# Altium PCB 5V Regulator.PcbDoc
Units mil, origin at the board's own origin, x right, y up, seen from the top; angles counter-clockwise.
Board outline 6000 x 4000 mil, 2 copper layers (Top Layer, Bottom Layer); 12 components, 8 nets, 31 pads, 6 vias.
Unrouted connection lines stored in the file: 21.
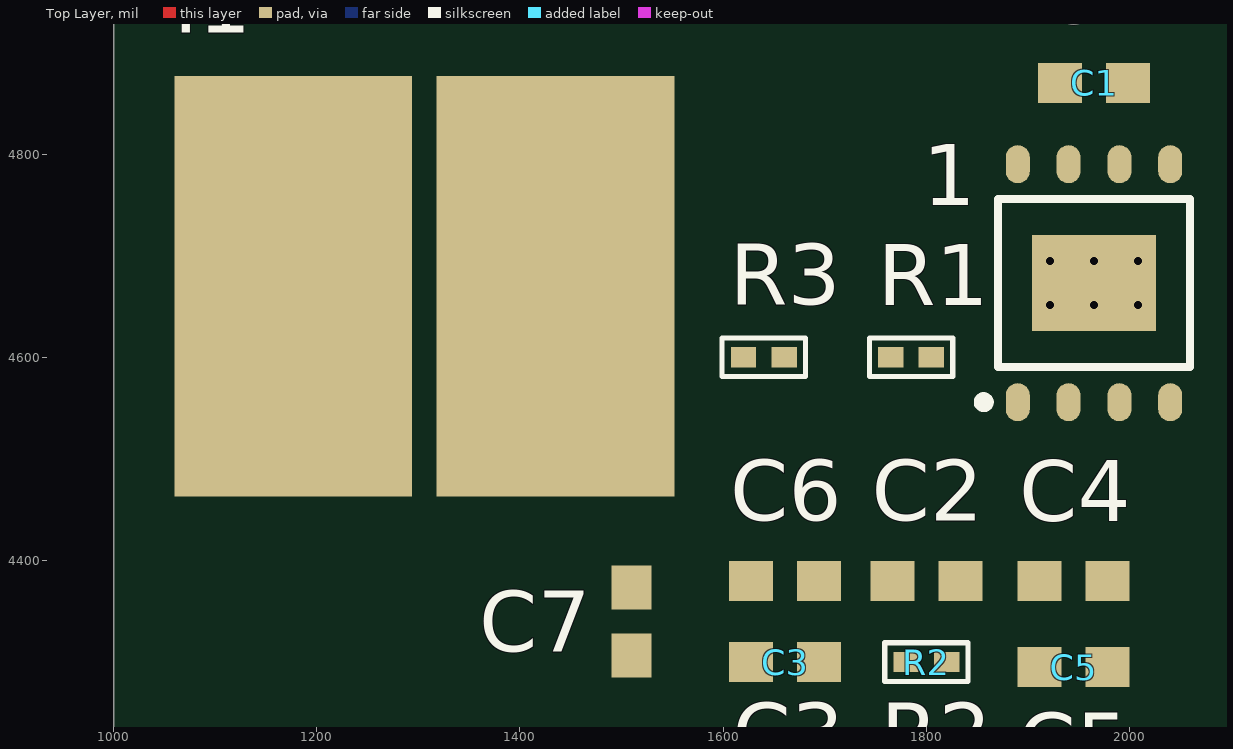
[diagram p0: Top Layer view]
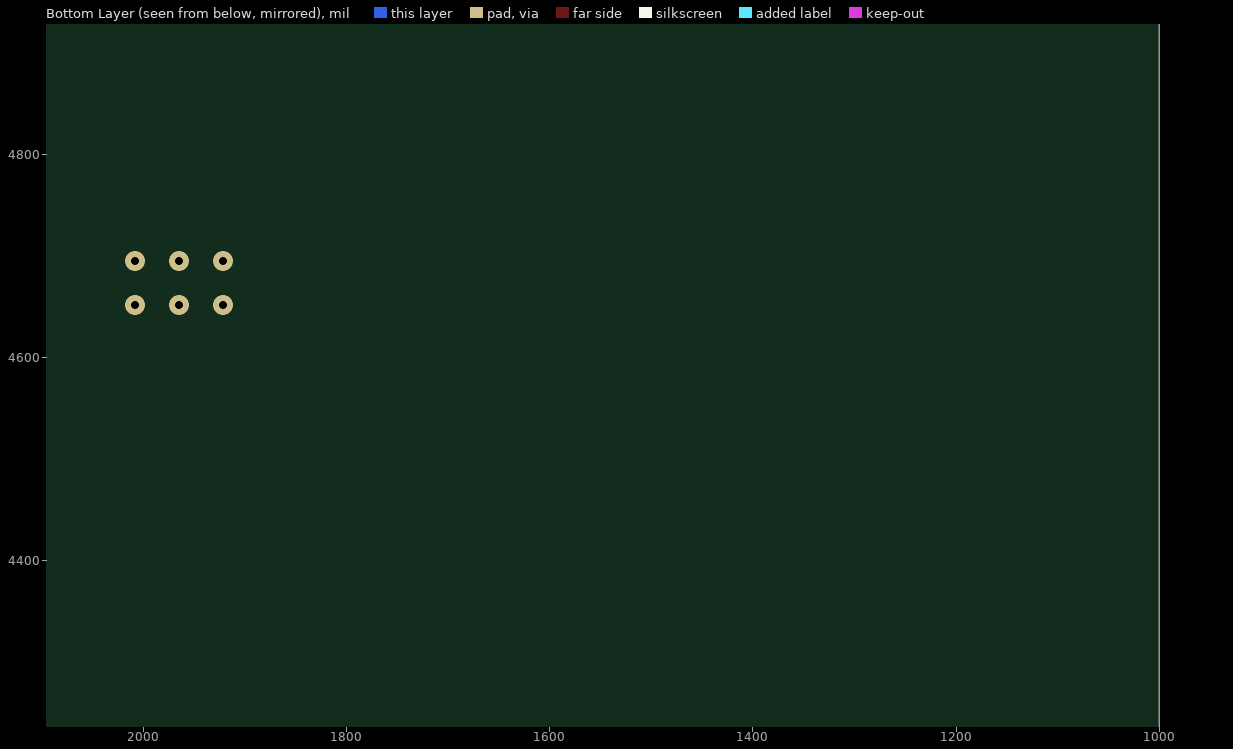
[diagram p1: Bottom Layer view, seen from below]

## Layer stack, top to bottom
Top Solder: solder mask 0.4, Solder Resist, Dk 3.5
Top Layer: signal copper 1.4
Dielectric 1: dielectric 12.6, FR-4, Dk 4.8
Bottom Layer: signal copper 1.4
Bottom Solder: solder mask 0.4, Solder Resist, Dk 3.5

## Board outline
1000,1000 7000,1000 7000,5000 1000,5000

## Design rules (kind name [scope] priority, off if disabled: settings)
Clearance [All] p1: gap=10 ignorepadtopadclearanceinfootprint=FALSE except(0: Arc-Hole Track-Hole SMDPad-Hole THPad-Hole Via-Hole Fill-Hole Poly-Hole Region-Hole Text-Hole)
PolygonConnect [All] p1: connectstyle=Relief reliefconductorwidth=10 reliefentries=4 polygonreliefangle="90 Angle" airgapwidth=10
RoomDefinition "5V Regulator" [InComponentClass('5V Regulator')] p1: confinementstyle=ConfineIn formatcopy=TRUE lockcomponents=FALSE outline 995,4130 2135,4130 2135,5000 995,5000
RoutingVias [All] p1: holewidth=28 width=50 viastyle="Through Hole" minholewidth=28 minwidth=50 maxholewidth=28 maxwidth=50
SolderMaskExpansion [All] p1: expansion=4
Width [All] p1: maxlimit=10 minlimit=10 preferedwidth=10
30 further rules are at their usual default settings.

## Components (designator, comment, footprint, x,y, rotation, side; value= is the part's Value field where it differs from the comment)
1 "TPS54627DDA" SOIC127P600X170_HS-9N 2040,4790 r90 top
C1 "CAP-11378" 0603 1965,4870 r0 top
C2 "CAP-11378" 0603 1800,4380 r0 top
C3 "100nF" 0603 1661,4300 r180 top
C4 "10.0uF" 0603 1945,4380 r0 top
C5 "100nF" 0603 1945,4295 r180 top
C6 "15.0pF" 0603 1661,4380 r0 top
C7 "CAP-11378" 0603 1510,4340 r90 top
I1 "3.3uH" SRP1040 1305.87,4670 r0 top
R1 "TBD" 0402R-TBD 1805,4600 r180 top
R2 "121k" 0402R-TBD 1780,4300 r0 top
R3 "22.1k" 0402R-TBD 1620,4600 r0 top

## Footprints (in the part's own frame and the unit in brackets; to place one, negate y for a bottom-side part, rotate by r counter-clockwise, add the part's x,y. Pads: shape width x height; smd on the part's side, far side on the other; paste and mask are expansions set on the pad)
0402R-TBD [mil]
  rect 25x20 smd: 1(0,0) 2(40,0)
  silkscreen extent -21,-19 61,19, body extent -6,-10 46,10, height 14
0603 [mm]
  rect 1.1x1 smd: 1(-0.85,0) 2(0.85,0)
SOIC127P600X170_HS-9N [mm] "SOIC, 8-Leads, Body 4.90x4.90mm, Pitch 1.27mm, Thermal Pad 3.10x2.40mm, IPC Medium Density"
  oval 0.95x0.6 smd: 1(-5.95,3.81) 2(-5.95,2.54) 3(-5.95,1.27) 4(-5.95,0) 5(0,0) 6(0,1.27) 7(0,2.54) 8(0,3.81)
  rect 2.4x3.1 smd: 9(-2.975,1.905)
  silkscreen extent -6.07,-0.5 -0.88,4.78, body extent -6.11,-0.5 0.16,4.31, height 1.85
SRP1040 [mm] "Chip Inductor, 2-Leads, Body 11.00x10.00mm, IPC Medium Density"
  rect 5.94x10.51 smd: 1(-3.28,0) 2(3.28,0)
  body extent -5.9,-5.25 5.9,5.25, height 4.2

## Part data
1: "IC REG BUCK ADJ 6A SYNC 8SOPWR", Base Part Number=TPS54627, Current - Output=6A, Frequency - Switching=650kHz, Manufacturer="Texas Instruments", Operating Temperature="-40°C ~ 85°C (TA)", Package / Case="8-PowerSOIC (0.154\", 3.90mm Width)", Supplier Device Package="8-SO PowerPad", Supplier Part Number 1=296-36192-5-ND, Voltage - Input (Max)=18V, Voltage - Input (Min)=4.5V, Voltage - Output (Max)=5.5V, Voltage - Output (Min/Fixed)=0.765V, Category="Integrated Circuits (ICs)", ComponentLink1Description=http://www.ti.com/lit/ds/symlink/tps54627.pdf, ComponentLink1URL=http://www.ti.com/lit/ds/symlink/tps54627.pdf, Function=Step-Down, Manufacturer Part Number=TPS54627DDA, Mounting Type="Surface Mount", Number of Outputs=1, Output Configuration=Positive, Output Type=Adjustable, Packaging=Tube, Part Status=Active, Pricing 1="1=2.94, 10=2.639, 100=2.1626, 500=1.84094, 1000=1.5526 (USD)", RoHS="RoHS Compliant", Stock 1=282, Supplier 1=Digi-Key, Synchronous Rectifier=Yes, Topology=Buck
C1 C2 C3 C4 C5 C6 C7: library part 4.7NF-50V-10%(0603), PROD_ID=CAP-11378
I1: library part SRP1040-3R3M, "FIXED IND 3.3UH 10A 10 MOHM SMD", DC Resistance (DCR)="10 mOhm Max", Manufacturer="Bourns Inc.", Operating Temperature="-55°C ~ 150°C", Package / Case=Nonstandard, Q @ Freq=-, Supplier Part Number 1=SRP1040-3R3MCT-ND, Tolerance=±20%, Category="Inductors, Coils, Chokes", ComponentLink1Description=http://www.bourns.com/docs/Product-Datasheets/SRP1040.pdf, ComponentLink1URL=http://www.bourns.com/docs/Product-Datasheets/SRP1040.pdf, Height - Seated (Max)="0.165\" (4.20mm)", Manufacturer Part Number=SRP1040-3R3M, Material - Core=Iron, Mounting Type="Surface Mount", Packaging="Cut Tape (CT)", Part Status=Active, Pricing 1="1=1.43, 10=1.32, 100=0.9237 (USD)", Ratings=-, RoHS="RoHS Compliant", Shielding=Shielded, Size / Dimension="0.465\" L x 0.413\" W (11.80mm x 10.50mm)", Stock 1=575, Supplier 1=Digi-Key, Supplier Device Package=-, Type=-
R1 R2 R3: library part 0402R-TBD, "RESISTOR 0402 VALUE TO BE DETERMINED"

## Via types
v1: diameter 19.68, hole 7.87, Top Layer to Bottom Layer, 6 vias

## Nets (pads, with @x,y where several pads share a name; then routed paths per layer and width w, separated by ;. In a path a pad name is that pad's centre, name@x,y a point inside that pad or via, vN(x,y) a via of type N, cw(c..) or ccw(c..) an arc to the next point about the centre after c; other vN are vias at no path point)
GND: 1.2 1.5 C1.2 C2.2 C4.2 C5.2 C6.2 C7.2 R2.2 R3.1 R3.2
Net1_1: 1.1 R1.2
Net1_3: 1.3 C4.1
Net1_4: 1.4 C5.1
Net1_6: 1.6 I1.1
Net1_7: 1.7 C3.1
Net1_8: 1.8 C1.1 C2.1 R1.1
NetC3_2: C3.2 C6.1 C7.1 R2.1
pads on no net: 1.9 I1.2
copper on no net:
  other v1: 1921.69,4651.22 1965,4651.22 2008.31,4651.22 1921.69,4694.53 1965,4694.53 2008.31,4694.53